# Altium PCB MAGI'sBatteryPowerMega-Python.PcbDoc (part 2 of 3)
Units mil, origin at the board's own origin, x right, y up, seen from the top; angles counter-clockwise.
Board outline 6000 x 4000 mil, 2 copper layers (Top Layer, Bottom Layer); 34 components, 41 nets, 184 pads, 153 vias.
Unrouted connection lines stored in the file: 5.
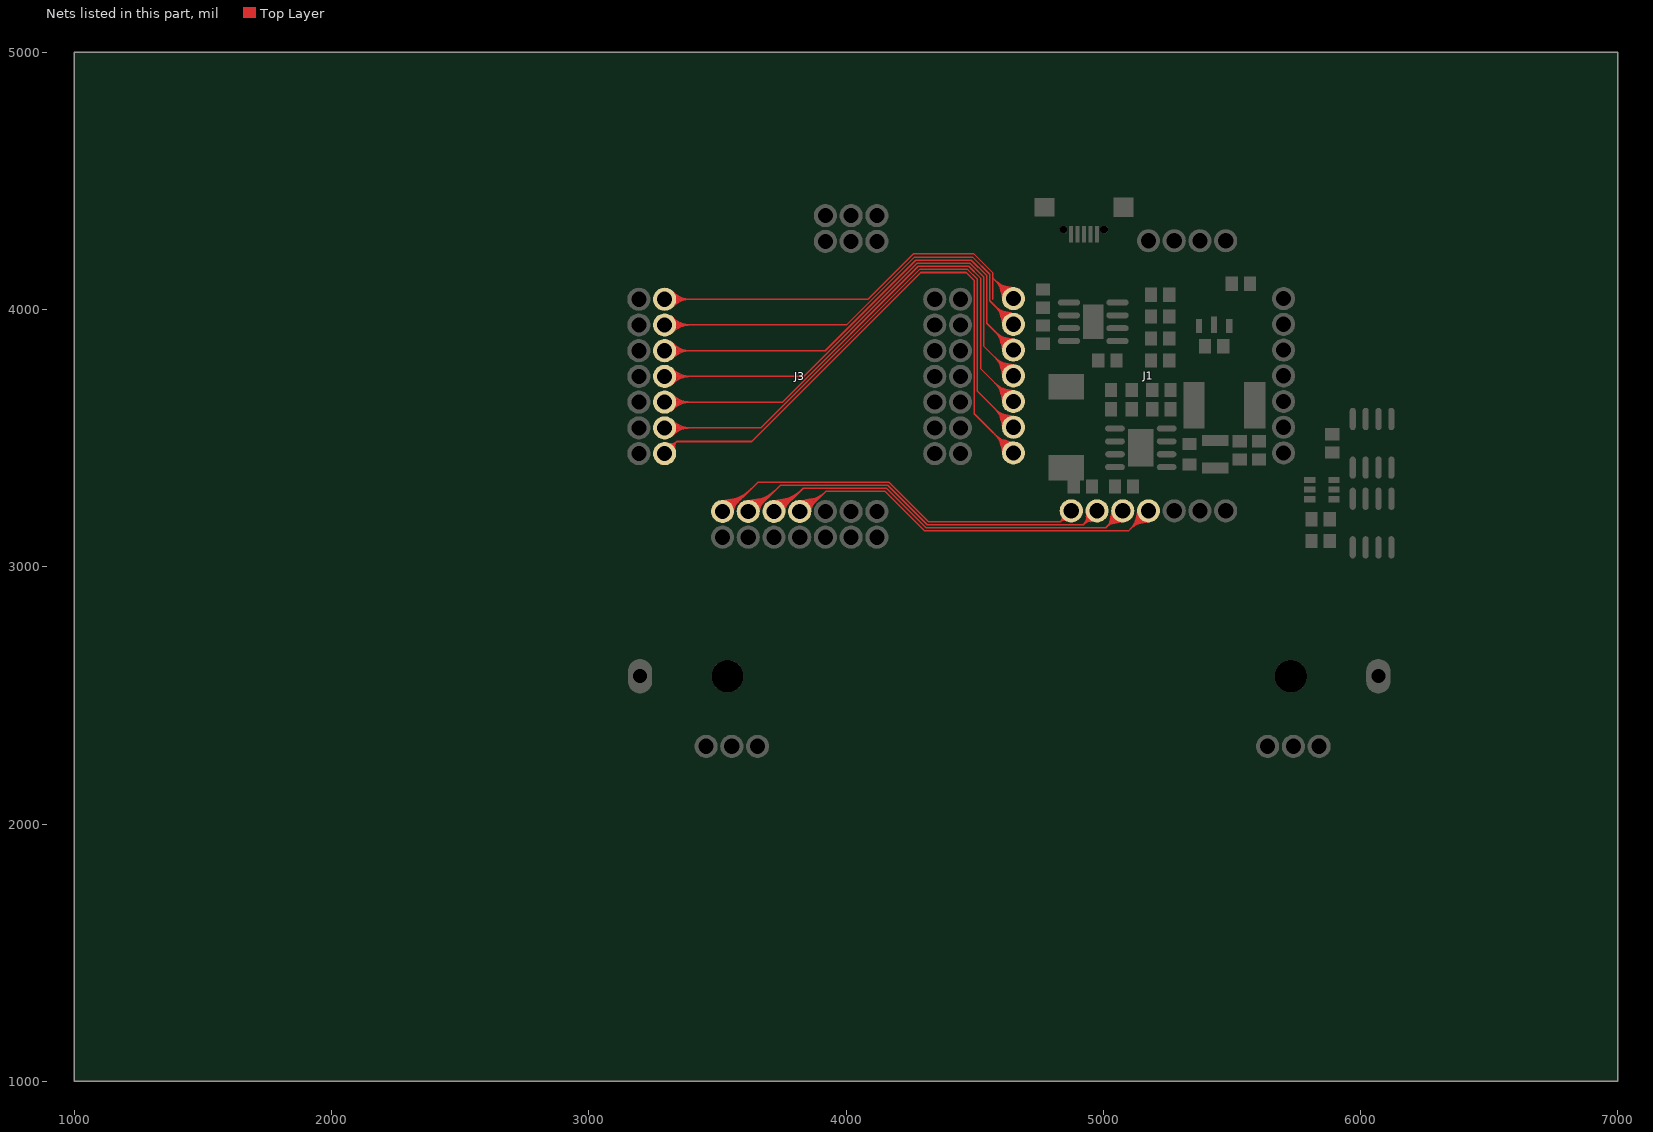
[diagram p2: the nets of this part, all layers, seen from the top]

## Via types
v1: diameter 19.68, hole 19.68, Top Layer to Bottom Layer, 125 vias
v2: diameter 19.68, hole 11.81, Top Layer to Bottom Layer, 11 vias
v3: diameter 35.43, hole 35.43, Top Layer to Bottom Layer, 6 vias
v4: diameter 35.43, hole 31.5, Top Layer to Bottom Layer, 6 vias
v5: diameter 19.68, hole 15.75, Top Layer to Bottom Layer, 5 vias

## Nets (pads, with @x,y where several pads share a name; then routed paths per layer and width w, separated by ;. In a path a pad name is that pad's centre, name@x,y a point inside that pad or via, vN(x,y) a via of type N, cw(c..) or ccw(c..) an arc to the next point about the centre after c; other vN are vias at no path point) (continued)
D0: J1.8 J3.8 | length 4694.6
  Top Layer w6: J3.8@3295,4040 4085.18,4040 4261.18,4216 4497.19,4216 4571,4142.19 4571,4122.39 ; 4571,4039.36 4571,4122.39 ; 4600.32,4082.53 ccw(c4668.05,4097.11) J1.8@4647.36,4030.99 ; 4602.48,4072.47 ccw(c4664.52,4085.82) J1.8@4645.57,4025.26 ; 4603.93,4083.55 ccw(c4658.1,4098.06) J1.8@4650.94,4042.44 ; 4604.65,4062.41 ccw(c4660.99,4074.54) J1.8@4643.78,4019.54 ; 4606.25,4074.9 ccw(c4656.87,4088.47) J1.8@4650.18,4036.49 ; 4606.81,4052.35 ccw(c4657.45,4063.25) J1.8@4641.99,4013.81 ; 4608.56,4066.26 ccw(c4655.63,4078.87) J1.8@4649.41,4030.54 ; 4609.84,4089.46 cw(c4595.32,4035.29) J1.8@4650.94,4042.44 ; 4610.78,4080.37 ccw(c4652.42,4091.53) J1.8@4651.13,4048.44 ; 4610.85,4093.07 cw(c4596.27,4025.34) J1.8@4662.4,4046.02 ; 4612.87,4072.58 ccw(c4652.17,4083.11) J1.8@4650.94,4042.44 ; 4613.01,4082.6 cw(c4601.86,4040.96) J1.8@4644.95,4042.26 ; 4618.48,4087.14 cw(c4604.92,4036.52) J1.8@4656.9,4043.21 ; 4620.81,4080.52 cw(c4610.28,4041.22) J1.8@4650.94,4042.44 ; 4620.91,4090.9 cw(c4607.56,4028.87) J1.8@4668.12,4047.82 ; 4627.13,4084.82 cw(c4614.52,4037.76) J1.8@4662.85,4043.97 ; 4630.97,4088.74 cw(c4618.85,4032.4) J1.8@4673.85,4049.61 ; 4641.04,4086.57 cw(c4630.14,4035.93) J1.8@4679.58,4051.4 ; 3352.94,4040 cw(c3352.94,4097.94) 3311.97,4056.97 ccw(c3352.94,4097.94) 3352.94,4040 ; 3352.94,4040 ccw(c3352.94,3982.06) 3311.97,4023.03 cw(c3352.94,3982.06) 3352.94,4040 ; 3367.43,4040 cw(c3367.43,4112.43) 3316.21,4061.21 ccw(c3367.43,4112.43) 3367.43,4040 ; 3367.43,4040 ccw(c3367.43,3967.57) 3316.21,4018.79 cw(c3367.43,3967.57) 3367.43,4040 ; 3381.91,4040 cw(c3381.91,4126.91) 3320.46,4065.46 ccw(c3381.91,4126.91) 3381.91,4040 ; 3381.91,4040 ccw(c3381.91,3953.09) 3320.46,4014.54 cw(c3381.91,3953.09) 3381.91,4040 ; 3396.4,4040 cw(c3396.4,4141.4) 3324.7,4069.7 ccw(c3396.4,4141.4) 3396.4,4040 ; 3396.4,4040 ccw(c3396.4,3938.6) 3324.7,4010.3 cw(c3396.4,3938.6) 3396.4,4040 ; 4571,4122.39 J1.8@4650.94,4042.44 ; 4579.25,4114.14 cw(c4507.55,4042.44) 4608.94,4042.44 ccw(c4507.55,4042.44) 4579.25,4114.14 ; 4579.25,4114.14 ccw(c4650.94,4185.84) 4650.94,4084.44 cw(c4650.94,4185.84) 4579.25,4114.14 ; 4589.49,4103.9 cw(c4528.03,4042.44) 4614.94,4042.44 ccw(c4528.03,4042.44) 4589.49,4103.9 ; 4589.49,4103.9 ccw(c4650.94,4165.35) 4650.94,4078.44 cw(c4650.94,4165.35) 4589.49,4103.9 ; 4599.73,4093.65 cw(c4548.52,4042.44) 4620.94,4042.44 ccw(c4548.52,4042.44) 4599.73,4093.65 ; 4599.73,4093.65 ccw(c4650.94,4144.87) 4650.94,4072.44 cw(c4650.94,4144.87) 4599.73,4093.65 ; 4609.97,4083.41 cw(c4569,4042.44) 4626.94,4042.44 ccw(c4569,4042.44) 4609.97,4083.41 ; 4609.97,4083.41 ccw(c4650.94,4124.38) 4650.94,4066.44 cw(c4650.94,4124.38) 4609.97,4083.41
D1: J1.9 J3.9 | length 4733.1
  Top Layer w6: J3.9@3295,3940 4002.15,3940 4266.15,4204 4492.22,4204 4559,4137.22 4559,4034.39 J1.9@4650.94,3942.44 ; 4600.32,3982.53 ccw(c4668.05,3997.11) J1.9@4647.36,3930.99 ; 4602.48,3972.47 ccw(c4664.52,3985.82) J1.9@4645.57,3925.26 ; 4603.93,3983.55 ccw(c4658.1,3998.06) J1.9@4650.94,3942.44 ; 4604.65,3962.41 ccw(c4660.99,3974.54) J1.9@4643.78,3919.54 ; 4606.25,3974.9 ccw(c4656.87,3988.47) J1.9@4650.18,3936.49 ; 4606.81,3952.35 ccw(c4657.45,3963.25) J1.9@4641.99,3913.81 ; 4608.56,3966.26 ccw(c4655.63,3978.87) J1.9@4649.41,3930.54 ; 4609.84,3989.46 cw(c4595.32,3935.29) J1.9@4650.94,3942.44 ; 4610.78,3980.37 ccw(c4652.42,3991.53) J1.9@4651.13,3948.44 ; 4610.85,3993.07 cw(c4596.27,3925.34) J1.9@4662.4,3946.02 ; 4612.87,3972.58 ccw(c4652.17,3983.11) J1.9@4650.94,3942.44 ; 4613.01,3982.6 cw(c4601.86,3940.96) J1.9@4644.95,3942.26 ; 4618.48,3987.14 cw(c4604.92,3936.52) J1.9@4656.9,3943.21 ; 4620.81,3980.52 cw(c4610.28,3941.22) J1.9@4650.94,3942.44 ; 4620.91,3990.9 cw(c4607.56,3928.87) J1.9@4668.12,3947.82 ; 4627.13,3984.82 cw(c4614.52,3937.76) J1.9@4662.85,3943.97 ; 4630.97,3988.74 cw(c4618.85,3932.4) J1.9@4673.85,3949.61 ; 4641.04,3986.57 cw(c4630.14,3935.93) J1.9@4679.58,3951.4 ; 3352.94,3940 cw(c3352.94,3997.94) 3311.97,3956.97 ccw(c3352.94,3997.94) 3352.94,3940 ; 3352.94,3940 ccw(c3352.94,3882.06) 3311.97,3923.03 cw(c3352.94,3882.06) 3352.94,3940 ; 3367.43,3940 cw(c3367.43,4012.43) 3316.21,3961.21 ccw(c3367.43,4012.43) 3367.43,3940 ; 3367.43,3940 ccw(c3367.43,3867.57) 3316.21,3918.79 cw(c3367.43,3867.57) 3367.43,3940 ; 3381.91,3940 cw(c3381.91,4026.91) 3320.46,3965.46 ccw(c3381.91,4026.91) 3381.91,3940 ; 3381.91,3940 ccw(c3381.91,3853.09) 3320.46,3914.54 cw(c3381.91,3853.09) 3381.91,3940 ; 3396.4,3940 cw(c3396.4,4041.4) 3324.7,3969.7 ccw(c3396.4,4041.4) 3396.4,3940 ; 3396.4,3940 ccw(c3396.4,3838.6) 3324.7,3910.3 cw(c3396.4,3838.6) 3396.4,3940 ; 4579.25,4014.14 cw(c4507.55,3942.44) 4608.94,3942.44 ccw(c4507.55,3942.44) 4579.25,4014.14 ; 4579.25,4014.14 ccw(c4650.94,4085.84) 4650.94,3984.44 cw(c4650.94,4085.84) 4579.25,4014.14 ; 4589.49,4003.9 cw(c4528.03,3942.44) 4614.94,3942.44 ccw(c4528.03,3942.44) 4589.49,4003.9 ; 4589.49,4003.9 ccw(c4650.94,4065.35) 4650.94,3978.44 cw(c4650.94,4065.35) 4589.49,4003.9 ; 4599.73,3993.65 cw(c4548.52,3942.44) 4620.94,3942.44 ccw(c4548.52,3942.44) 4599.73,3993.65 ; 4599.73,3993.65 ccw(c4650.94,4044.87) 4650.94,3972.44 cw(c4650.94,4044.87) 4599.73,3993.65 ; 4609.97,3983.41 cw(c4569,3942.44) 4626.94,3942.44 ccw(c4569,3942.44) 4609.97,3983.41 ; 4609.97,3983.41 ccw(c4650.94,4024.38) 4650.94,3966.44 cw(c4650.94,4024.38) 4609.97,3983.41
D2: J1.10 J3.10 | length 4854.7
  Top Layer w6: J3.10@3295,3840 3919.12,3840 4271.12,4192 4487.25,4192 4547,4132.25 4547,3946.39 J1.10@4650.94,3842.44 ; 4600.32,3882.53 ccw(c4668.05,3897.11) J1.10@4647.36,3830.99 ; 4602.48,3872.47 ccw(c4664.52,3885.82) J1.10@4645.57,3825.26 ; 4603.93,3883.55 ccw(c4658.1,3898.06) J1.10@4650.94,3842.44 ; 4604.65,3862.41 ccw(c4660.99,3874.54) J1.10@4643.78,3819.54 ; 4606.25,3874.9 ccw(c4656.87,3888.47) J1.10@4650.18,3836.49 ; 4606.81,3852.35 ccw(c4657.45,3863.25) J1.10@4641.99,3813.81 ; 4608.56,3866.26 ccw(c4655.63,3878.87) J1.10@4649.41,3830.54 ; 4609.84,3889.46 cw(c4595.32,3835.29) J1.10@4650.94,3842.44 ; 4610.78,3880.37 ccw(c4652.42,3891.53) J1.10@4651.13,3848.44 ; 4610.85,3893.07 cw(c4596.27,3825.34) J1.10@4662.4,3846.02 ; 4612.87,3872.58 ccw(c4652.17,3883.11) J1.10@4650.94,3842.44 ; 4613.01,3882.6 cw(c4601.86,3840.96) J1.10@4644.95,3842.26 ; 4618.48,3887.14 cw(c4604.92,3836.52) J1.10@4656.9,3843.21 ; 4620.81,3880.52 cw(c4610.28,3841.22) J1.10@4650.94,3842.44 ; 4620.91,3890.9 cw(c4607.56,3828.87) J1.10@4668.12,3847.82 ; 4627.13,3884.82 cw(c4614.52,3837.76) J1.10@4662.85,3843.97 ; 4630.97,3888.74 cw(c4618.85,3832.4) J1.10@4673.85,3849.61 ; 4641.04,3886.57 cw(c4630.14,3835.93) J1.10@4679.58,3851.4 ; 3352.94,3840 cw(c3352.94,3897.94) 3311.97,3856.97 ccw(c3352.94,3897.94) 3352.94,3840 ; 3352.94,3840 ccw(c3352.94,3782.06) 3311.97,3823.03 cw(c3352.94,3782.06) 3352.94,3840 ; 3367.43,3840 cw(c3367.43,3912.43) 3316.21,3861.21 ccw(c3367.43,3912.43) 3367.43,3840 ; 3367.43,3840 ccw(c3367.43,3767.57) 3316.21,3818.79 cw(c3367.43,3767.57) 3367.43,3840 ; 3381.91,3840 cw(c3381.91,3926.91) 3320.46,3865.46 ccw(c3381.91,3926.91) 3381.91,3840 ; 3381.91,3840 ccw(c3381.91,3753.09) 3320.46,3814.54 cw(c3381.91,3753.09) 3381.91,3840 ; 3396.4,3840 cw(c3396.4,3941.4) 3324.7,3869.7 ccw(c3396.4,3941.4) 3396.4,3840 ; 3396.4,3840 ccw(c3396.4,3738.6) 3324.7,3810.3 cw(c3396.4,3738.6) 3396.4,3840 ; 4579.25,3914.14 cw(c4507.55,3842.44) 4608.94,3842.44 ccw(c4507.55,3842.44) 4579.25,3914.14 ; 4579.25,3914.14 ccw(c4650.94,3985.84) 4650.94,3884.44 cw(c4650.94,3985.84) 4579.25,3914.14 ; 4589.49,3903.9 cw(c4528.03,3842.44) 4614.94,3842.44 ccw(c4528.03,3842.44) 4589.49,3903.9 ; 4589.49,3903.9 ccw(c4650.94,3965.35) 4650.94,3878.44 cw(c4650.94,3965.35) 4589.49,3903.9 ; 4599.73,3893.65 cw(c4548.52,3842.44) 4620.94,3842.44 ccw(c4548.52,3842.44) 4599.73,3893.65 ; 4599.73,3893.65 ccw(c4650.94,3944.87) 4650.94,3872.44 cw(c4650.94,3944.87) 4599.73,3893.65 ; 4609.97,3883.41 cw(c4569,3842.44) 4626.94,3842.44 ccw(c4569,3842.44) 4609.97,3883.41 ; 4609.97,3883.41 ccw(c4650.94,3924.38) 4650.94,3866.44 cw(c4650.94,3924.38) 4609.97,3883.41
D3: J1.11 J3.11 | length 4976.2
  Top Layer w6: J3.11@3295,3740 3836.09,3740 4276.09,4180 4482.28,4180 4535,4127.28 4535,3858.39 J1.11@4650.94,3742.44 ; 4600.32,3782.53 ccw(c4668.05,3797.11) J1.11@4647.36,3730.99 ; 4602.48,3772.47 ccw(c4664.52,3785.82) J1.11@4645.57,3725.26 ; 4603.93,3783.55 ccw(c4658.1,3798.06) J1.11@4650.94,3742.44 ; 4604.65,3762.41 ccw(c4660.99,3774.54) J1.11@4643.78,3719.54 ; 4606.25,3774.9 ccw(c4656.87,3788.47) J1.11@4650.18,3736.49 ; 4606.81,3752.35 ccw(c4657.45,3763.25) J1.11@4641.99,3713.81 ; 4608.56,3766.26 ccw(c4655.63,3778.87) J1.11@4649.41,3730.54 ; 4609.84,3789.46 cw(c4595.32,3735.29) J1.11@4650.94,3742.44 ; 4610.78,3780.37 ccw(c4652.42,3791.53) J1.11@4651.13,3748.44 ; 4610.85,3793.07 cw(c4596.27,3725.34) J1.11@4662.4,3746.02 ; 4612.87,3772.58 ccw(c4652.17,3783.11) J1.11@4650.94,3742.44 ; 4613.01,3782.6 cw(c4601.86,3740.96) J1.11@4644.95,3742.26 ; 4618.48,3787.14 cw(c4604.92,3736.52) J1.11@4656.9,3743.21 ; 4620.81,3780.52 cw(c4610.28,3741.22) J1.11@4650.94,3742.44 ; 4620.91,3790.9 cw(c4607.56,3728.87) J1.11@4668.12,3747.82 ; 4627.13,3784.82 cw(c4614.52,3737.76) J1.11@4662.85,3743.97 ; 4630.97,3788.74 cw(c4618.85,3732.4) J1.11@4673.85,3749.61 ; 4641.04,3786.57 cw(c4630.14,3735.93) J1.11@4679.58,3751.4 ; 3352.94,3740 cw(c3352.94,3797.94) 3311.97,3756.97 ccw(c3352.94,3797.94) 3352.94,3740 ; 3352.94,3740 ccw(c3352.94,3682.06) 3311.97,3723.03 cw(c3352.94,3682.06) 3352.94,3740 ; 3367.43,3740 cw(c3367.43,3812.43) 3316.21,3761.21 ccw(c3367.43,3812.43) 3367.43,3740 ; 3367.43,3740 ccw(c3367.43,3667.57) 3316.21,3718.79 cw(c3367.43,3667.57) 3367.43,3740 ; 3381.91,3740 cw(c3381.91,3826.91) 3320.46,3765.46 ccw(c3381.91,3826.91) 3381.91,3740 ; 3381.91,3740 ccw(c3381.91,3653.09) 3320.46,3714.54 cw(c3381.91,3653.09) 3381.91,3740 ; 3396.4,3740 cw(c3396.4,3841.4) 3324.7,3769.7 ccw(c3396.4,3841.4) 3396.4,3740 ; 3396.4,3740 ccw(c3396.4,3638.6) 3324.7,3710.3 cw(c3396.4,3638.6) 3396.4,3740 ; 4579.25,3814.14 cw(c4507.55,3742.44) 4608.94,3742.44 ccw(c4507.55,3742.44) 4579.25,3814.14 ; 4579.25,3814.14 ccw(c4650.94,3885.84) 4650.94,3784.44 cw(c4650.94,3885.84) 4579.25,3814.14 ; 4589.49,3803.9 cw(c4528.03,3742.44) 4614.94,3742.44 ccw(c4528.03,3742.44) 4589.49,3803.9 ; 4589.49,3803.9 ccw(c4650.94,3865.35) 4650.94,3778.44 cw(c4650.94,3865.35) 4589.49,3803.9 ; 4599.73,3793.65 cw(c4548.52,3742.44) 4620.94,3742.44 ccw(c4548.52,3742.44) 4599.73,3793.65 ; 4599.73,3793.65 ccw(c4650.94,3844.87) 4650.94,3772.44 cw(c4650.94,3844.87) 4599.73,3793.65 ; 4609.97,3783.41 cw(c4569,3742.44) 4626.94,3742.44 ccw(c4569,3742.44) 4609.97,3783.41 ; 4609.97,3783.41 ccw(c4650.94,3824.38) 4650.94,3766.44 cw(c4650.94,3824.38) 4609.97,3783.41
D4: J1.12 J3.12 | length 5097.8
  Top Layer w6: J3.12@3295,3640 3753.06,3640 4281.06,4168 4477.31,4168 4523,4122.31 4523,3770.39 J1.12@4650.94,3642.44 ; 4600.32,3682.53 ccw(c4668.05,3697.11) J1.12@4647.36,3630.99 ; 4602.48,3672.47 ccw(c4664.52,3685.82) J1.12@4645.57,3625.26 ; 4603.93,3683.55 ccw(c4658.1,3698.06) J1.12@4650.94,3642.44 ; 4604.65,3662.41 ccw(c4660.99,3674.54) J1.12@4643.78,3619.54 ; 4606.25,3674.9 ccw(c4656.87,3688.47) J1.12@4650.18,3636.49 ; 4606.81,3652.35 ccw(c4657.45,3663.25) J1.12@4641.99,3613.81 ; 4608.56,3666.26 ccw(c4655.63,3678.87) J1.12@4649.41,3630.54 ; 4609.84,3689.46 cw(c4595.32,3635.29) J1.12@4650.94,3642.44 ; 4610.78,3680.37 ccw(c4652.42,3691.53) J1.12@4651.13,3648.44 ; 4610.85,3693.07 cw(c4596.27,3625.34) J1.12@4662.4,3646.02 ; 4612.87,3672.58 ccw(c4652.17,3683.11) J1.12@4650.94,3642.44 ; 4613.01,3682.6 cw(c4601.86,3640.96) J1.12@4644.95,3642.26 ; 4618.48,3687.14 cw(c4604.92,3636.52) J1.12@4656.9,3643.21 ; 4620.81,3680.52 cw(c4610.28,3641.22) J1.12@4650.94,3642.44 ; 4620.91,3690.9 cw(c4607.56,3628.87) J1.12@4668.12,3647.82 ; 4627.13,3684.82 cw(c4614.52,3637.76) J1.12@4662.85,3643.97 ; 4630.97,3688.74 cw(c4618.85,3632.4) J1.12@4673.85,3649.61 ; 4641.04,3686.57 cw(c4630.14,3635.93) J1.12@4679.58,3651.4 ; 3352.94,3640 cw(c3352.94,3697.94) 3311.97,3656.97 ccw(c3352.94,3697.94) 3352.94,3640 ; 3352.94,3640 ccw(c3352.94,3582.06) 3311.97,3623.03 cw(c3352.94,3582.06) 3352.94,3640 ; 3367.43,3640 cw(c3367.43,3712.43) 3316.21,3661.21 ccw(c3367.43,3712.43) 3367.43,3640 ; 3367.43,3640 ccw(c3367.43,3567.57) 3316.21,3618.79 cw(c3367.43,3567.57) 3367.43,3640 ; 3381.91,3640 cw(c3381.91,3726.91) 3320.46,3665.46 ccw(c3381.91,3726.91) 3381.91,3640 ; 3381.91,3640 ccw(c3381.91,3553.09) 3320.46,3614.54 cw(c3381.91,3553.09) 3381.91,3640 ; 3396.4,3640 cw(c3396.4,3741.4) 3324.7,3669.7 ccw(c3396.4,3741.4) 3396.4,3640 ; 3396.4,3640 ccw(c3396.4,3538.6) 3324.7,3610.3 cw(c3396.4,3538.6) 3396.4,3640 ; 4579.25,3714.14 cw(c4507.55,3642.44) 4608.94,3642.44 ccw(c4507.55,3642.44) 4579.25,3714.14 ; 4579.25,3714.14 ccw(c4650.94,3785.84) 4650.94,3684.44 cw(c4650.94,3785.84) 4579.25,3714.14 ; 4589.49,3703.9 cw(c4528.03,3642.44) 4614.94,3642.44 ccw(c4528.03,3642.44) 4589.49,3703.9 ; 4589.49,3703.9 ccw(c4650.94,3765.35) 4650.94,3678.44 cw(c4650.94,3765.35) 4589.49,3703.9 ; 4599.73,3693.65 cw(c4548.52,3642.44) 4620.94,3642.44 ccw(c4548.52,3642.44) 4599.73,3693.65 ; 4599.73,3693.65 ccw(c4650.94,3744.87) 4650.94,3672.44 cw(c4650.94,3744.87) 4599.73,3693.65 ; 4609.97,3683.41 cw(c4569,3642.44) 4626.94,3642.44 ccw(c4569,3642.44) 4609.97,3683.41 ; 4609.97,3683.41 ccw(c4650.94,3724.38) 4650.94,3666.44 cw(c4650.94,3724.38) 4609.97,3683.41
D5: J1.13 J3.13 | length 5219.3
  Top Layer w6: J3.13@3295,3540 3670.03,3540 4286.03,4156 4472.34,4156 4511,4117.34 4511,3682.39 J1.13@4650.94,3542.44 ; 4600.32,3582.53 ccw(c4668.05,3597.11) J1.13@4647.36,3530.99 ; 4602.48,3572.47 ccw(c4664.52,3585.82) J1.13@4645.57,3525.26 ; 4603.93,3583.55 ccw(c4658.1,3598.06) J1.13@4650.94,3542.44 ; 4604.65,3562.41 ccw(c4660.99,3574.54) J1.13@4643.78,3519.54 ; 4606.25,3574.9 ccw(c4656.87,3588.47) J1.13@4650.18,3536.49 ; 4606.81,3552.35 ccw(c4657.45,3563.25) J1.13@4641.99,3513.81 ; 4608.56,3566.26 ccw(c4655.63,3578.87) J1.13@4649.41,3530.54 ; 4609.84,3589.46 cw(c4595.32,3535.29) J1.13@4650.94,3542.44 ; 4610.78,3580.37 ccw(c4652.42,3591.53) J1.13@4651.13,3548.44 ; 4610.85,3593.07 cw(c4596.27,3525.34) J1.13@4662.4,3546.02 ; 4612.87,3572.58 ccw(c4652.17,3583.11) J1.13@4650.94,3542.44 ; 4613.01,3582.6 cw(c4601.86,3540.96) J1.13@4644.95,3542.26 ; 4618.48,3587.14 cw(c4604.92,3536.52) J1.13@4656.9,3543.21 ; 4620.81,3580.52 cw(c4610.28,3541.22) J1.13@4650.94,3542.44 ; 4620.91,3590.9 cw(c4607.56,3528.87) J1.13@4668.12,3547.82 ; 4627.13,3584.82 cw(c4614.52,3537.76) J1.13@4662.85,3543.97 ; 4630.97,3588.74 cw(c4618.85,3532.4) J1.13@4673.85,3549.61 ; 4641.04,3586.57 cw(c4630.14,3535.93) J1.13@4679.58,3551.4 ; 3352.94,3540 cw(c3352.94,3597.94) 3311.97,3556.97 ccw(c3352.94,3597.94) 3352.94,3540 ; 3352.94,3540 ccw(c3352.94,3482.06) 3311.97,3523.03 cw(c3352.94,3482.06) 3352.94,3540 ; 3367.43,3540 cw(c3367.43,3612.43) 3316.21,3561.21 ccw(c3367.43,3612.43) 3367.43,3540 ; 3367.43,3540 ccw(c3367.43,3467.57) 3316.21,3518.79 cw(c3367.43,3467.57) 3367.43,3540 ; 3381.91,3540 cw(c3381.91,3626.91) 3320.46,3565.46 ccw(c3381.91,3626.91) 3381.91,3540 ; 3381.91,3540 ccw(c3381.91,3453.09) 3320.46,3514.54 cw(c3381.91,3453.09) 3381.91,3540 ; 3396.4,3540 cw(c3396.4,3641.4) 3324.7,3569.7 ccw(c3396.4,3641.4) 3396.4,3540 ; 3396.4,3540 ccw(c3396.4,3438.6) 3324.7,3510.3 cw(c3396.4,3438.6) 3396.4,3540 ; 4579.25,3614.14 cw(c4507.55,3542.44) 4608.94,3542.44 ccw(c4507.55,3542.44) 4579.25,3614.14 ; 4579.25,3614.14 ccw(c4650.94,3685.84) 4650.94,3584.44 cw(c4650.94,3685.84) 4579.25,3614.14 ; 4589.49,3603.9 cw(c4528.03,3542.44) 4614.94,3542.44 ccw(c4528.03,3542.44) 4589.49,3603.9 ; 4589.49,3603.9 ccw(c4650.94,3665.35) 4650.94,3578.44 cw(c4650.94,3665.35) 4589.49,3603.9 ; 4599.73,3593.65 cw(c4548.52,3542.44) 4620.94,3542.44 ccw(c4548.52,3542.44) 4599.73,3593.65 ; 4599.73,3593.65 ccw(c4650.94,3644.87) 4650.94,3572.44 cw(c4650.94,3644.87) 4599.73,3593.65 ; 4609.97,3583.41 cw(c4569,3542.44) 4626.94,3542.44 ccw(c4569,3542.44) 4609.97,3583.41 ; 4609.97,3583.41 ccw(c4650.94,3624.38) 4650.94,3566.44 cw(c4650.94,3624.38) 4609.97,3583.41
D6: J1.14 J3.14 | length 4809.7
  Top Layer w6: J3.14@3275.55,3462.84 cw(c3318.4,3412.53) 3323.67,3478.4 ; J3.14@3295,3440 3342,3487 ; J3.14@3317.84,3420.55 ccw(c3267.53,3463.4) 3333.4,3468.67 ; 4600.32,3482.53 ccw(c4668.05,3497.11) J1.14@4647.36,3430.99 ; 4602.48,3472.47 ccw(c4664.52,3485.82) J1.14@4645.57,3425.26 ; 4603.93,3483.55 ccw(c4658.1,3498.06) J1.14@4650.94,3442.44 ; 4604.65,3462.41 ccw(c4660.99,3474.54) J1.14@4643.78,3419.54 ; 4606.25,3474.9 ccw(c4656.87,3488.47) J1.14@4650.18,3436.49 ; 4606.81,3452.35 ccw(c4657.45,3463.25) J1.14@4641.99,3413.81 ; 4608.56,3466.26 ccw(c4655.63,3478.87) J1.14@4649.41,3430.54 ; 4609.84,3489.46 cw(c4595.32,3435.29) J1.14@4650.94,3442.44 ; 4610.78,3480.37 ccw(c4652.42,3491.53) J1.14@4651.13,3448.44 ; 4610.85,3493.07 cw(c4596.27,3425.34) J1.14@4662.4,3446.02 ; 4612.87,3472.58 ccw(c4652.17,3483.11) J1.14@4650.94,3442.44 ; 4613.01,3482.6 cw(c4601.86,3440.96) J1.14@4644.95,3442.26 ; 4618.48,3487.14 cw(c4604.92,3436.52) J1.14@4656.9,3443.21 ; 4620.81,3480.52 cw(c4610.28,3441.22) J1.14@4650.94,3442.44 ; 4620.91,3490.9 cw(c4607.56,3428.87) J1.14@4668.12,3447.82 ; 4627.13,3484.82 cw(c4614.52,3437.76) J1.14@4662.85,3443.97 ; 4630.97,3488.74 cw(c4618.85,3432.4) J1.14@4673.85,3449.61 ; 4641.04,3486.57 cw(c4630.14,3435.93) J1.14@4679.58,3451.4 ; 3328.57,3473.57 cw(c3312.61,3489.53) 3305.05,3468.27 ccw(c3312.61,3489.53) 3328.57,3473.57 ; 3328.57,3473.57 ccw(c3344.53,3457.61) 3323.27,3450.05 cw(c3344.53,3457.61) 3328.57,3473.57 ; 3335.28,3480.28 cw(c3316.14,3499.43) 3307.06,3473.92 ccw(c3316.14,3499.43) 3335.28,3480.28 ; 3335.28,3480.28 ccw(c3354.43,3461.14) 3328.92,3452.06 cw(c3354.43,3461.14) 3335.28,3480.28 ; 3342,3487 cw(c3319.66,3509.34) 3309.07,3479.57 ccw(c3319.66,3509.34) 3342,3487 ; 3342,3487 ccw(c3364.34,3464.66) 3334.57,3454.07 cw(c3364.34,3464.66) 3342,3487 ; 3342,3487 3634,3487 4291,4144 4467.37,4144 4499,4112.37 4499,3594.39 J1.14@4650.94,3442.44 ; 4579.25,3514.14 cw(c4507.55,3442.44) 4608.94,3442.44 ccw(c4507.55,3442.44) 4579.25,3514.14 ; 4579.25,3514.14 ccw(c4650.94,3585.84) 4650.94,3484.44 cw(c4650.94,3585.84) 4579.25,3514.14 ; 4589.49,3503.9 cw(c4528.03,3442.44) 4614.94,3442.44 ccw(c4528.03,3442.44) 4589.49,3503.9 ; 4589.49,3503.9 ccw(c4650.94,3565.35) 4650.94,3478.44 cw(c4650.94,3565.35) 4589.49,3503.9 ; 4599.73,3493.65 cw(c4548.52,3442.44) 4620.94,3442.44 ccw(c4548.52,3442.44) 4599.73,3493.65 ; 4599.73,3493.65 ccw(c4650.94,3544.87) 4650.94,3472.44 cw(c4650.94,3544.87) 4599.73,3493.65 ; 4609.97,3483.41 cw(c4569,3442.44) 4626.94,3442.44 ccw(c4569,3442.44) 4609.97,3483.41 ; 4609.97,3483.41 ccw(c4650.94,3524.38) 4650.94,3466.44 cw(c4650.94,3524.38) 4609.97,3483.41
D7: J1.15 J3.15 | length 4325.1
  Top Layer w6: J3.15@3494.72,3231.15 cw(c3548.65,3196.69) 3538.79,3259.93 ; J3.15@3499.78,3227.92 cw(c3563.6,3187.14) 3551.93,3261.98 ; J3.15@3503.23,3221.53 cw(c3556.2,3200.91) 3543.65,3256.35 ; J3.15@3504.83,3224.69 cw(c3578.56,3177.59) 3565.07,3264.03 ; J3.15@3508.82,3219.35 cw(c3568.89,3195.97) 3554.66,3258.85 ; J3.15@3514.24,3216.69 cw(c3565.13,3201.73) 3552.08,3253.14 ; J3.15@3514.41,3217.18 cw(c3581.59,3191.03) 3565.67,3261.34 ; J3.15@3519.23,3191.01 ccw(c3520.69,3236.44) 3564.59,3224.68 ; J3.15@3519.42,3197.01 ccw(c3520.94,3244.2) 3566.55,3231.98 ; J3.15@3519.61,3203.01 ccw(c3521.19,3251.97) 3568.51,3239.29 ; J3.15@3525.76,3213.31 cw(c3588.6,3194.83) 3572.48,3258.32 ; J3.15@3525.87,3213.78 cw(c3571.98,3204.17) 3559.79,3249.66 ; J3.15@3531.51,3211.62 cw(c3600.33,3191.39) 3582.68,3260.91 ; J3.15@3531.75,3212.55 cw(c3582.67,3201.94) 3569.2,3252.18 ; J3.15@3531.93,3213.7 cw(c3565.81,3209.99) 3556.99,3242.91 ; J3.15@3537.62,3211.33 cw(c3593.35,3199.72) 3578.62,3254.71 ; J3.15@3537.89,3213.04 cw(c3575.16,3208.97) 3565.46,3245.18 ; J3.15@3538,3246.18 ccw(c3551.78,3270.04) 3558.91,3243.42 ; J3.15@3543.99,3215.72 cw(c3566.18,3216.39) 3560.44,3237.83 ; 3557.88,3249.15 cw(c3552.12,3270.64) 3541,3251.37 ccw(c3562.02,3287.78) 3572.9,3247.17 ; 3562.28,3255.73 ccw(c3576.87,3198.28) J3.15@3520,3215 ; 3576.68,3263.83 ccw(c3594.28,3186.09) J3.15@3520,3215 ; J1.15@4875.94,3217.44 4833.94,3175.44 ; J3.15@3520,3215 3543.63,3215 3657.63,3329 4167.22,3329 4320.78,3175.44 4833.94,3175.44 ; 4833.95,3175.44 cw(c4848.79,3160.6) 4857.84,3179.54 ccw(c4848.79,3160.6) 4833.95,3175.44 ; 4833.95,3175.44 ccw(c4819.1,3190.29) 4838.05,3199.34 cw(c4819.1,3190.29) 4833.95,3175.44 ; 4839.95,3181.44 cw(c4852.67,3168.72) 4860.43,3184.96 ccw(c4852.67,3168.72) 4839.95,3181.44 ; 4839.95,3181.44 ccw(c4827.22,3194.17) 4843.46,3201.92 cw(c4827.22,3194.17) 4839.95,3181.44 ; J3.15@3520,3221 ccw(c3520,3292.54) 3570.59,3241.95 cw(c3520,3292.54) J3.15@3520,3221 ; J3.15@3520,3227 ccw(c3520,3313.02) 3580.83,3252.2 cw(c3520,3313.02) J3.15@3520,3227 ; J3.15@3520,3233 ccw(c3520,3333.51) 3591.07,3262.44 cw(c3520,3333.51) J3.15@3520,3233 ; J3.15@3520,3239 ccw(c3520,3353.99) 3601.31,3272.68 cw(c3520,3353.99) J3.15@3520,3239 ; J3.15@3520,3245 ccw(c3520,3374.48) 3611.56,3282.92 cw(c3520,3374.48) J3.15@3520,3245 ; J3.15@3520,3251 ccw(c3520,3394.97) 3621.8,3293.17 cw(c3520,3394.97) J3.15@3520,3251 ; J3.15@3520,3257 ccw(c3520,3415.45) 3632.04,3303.41 cw(c3520,3415.45) J3.15@3520,3257 ; J3.15@3556,3215 cw(c3585.86,3215) 3564.75,3236.11 ccw(c3585.86,3215) J3.15@3556,3215 ; J3.15@3562,3215 cw(c3606.34,3215) 3574.99,3246.36 ccw(c3606.34,3215) J3.15@3562,3215
D8: J1.16 J3.16 | length 4737.8
  Top Layer w6: J3.16@3594.72,3231.15 cw(c3648.65,3196.69) 3638.79,3259.93 ; J3.16@3599.78,3227.92 cw(c3663.6,3187.14) 3651.93,3261.98 ; J3.16@3603.23,3221.53 cw(c3656.2,3200.91) 3643.65,3256.35 ; J3.16@3604.83,3224.69 cw(c3678.56,3177.59) 3665.07,3264.03 ; J3.16@3608.82,3219.35 cw(c3668.89,3195.97) 3654.66,3258.85 ; J3.16@3614.24,3216.69 cw(c3665.13,3201.73) 3652.08,3253.14 ; J3.16@3614.41,3217.18 cw(c3681.59,3191.03) 3665.67,3261.34 ; J3.16@3619.23,3191.01 ccw(c3620.69,3236.44) 3664.59,3224.68 ; J3.16@3619.42,3197.01 ccw(c3620.94,3244.2) 3666.55,3231.98 ; J3.16@3619.61,3203.01 ccw(c3621.19,3251.97) 3668.51,3239.29 ; J3.16@3625.76,3213.31 cw(c3688.6,3194.83) 3672.48,3258.32 ; J3.16@3625.87,3213.78 cw(c3671.98,3204.17) 3659.79,3249.66 ; J3.16@3631.51,3211.62 cw(c3700.33,3191.39) 3682.68,3260.91 ; J3.16@3631.75,3212.55 cw(c3682.67,3201.94) 3669.2,3252.18 ; J3.16@3631.93,3213.7 cw(c3665.81,3209.99) 3656.99,3242.91 ; J3.16@3637.62,3211.33 cw(c3693.35,3199.72) 3678.62,3254.71 ; J3.16@3637.89,3213.04 cw(c3675.16,3208.97) 3665.46,3245.18 ; J3.16@3638,3246.18 ccw(c3651.78,3270.04) 3658.91,3243.42 ; J3.16@3643.99,3215.72 cw(c3666.18,3216.39) 3660.44,3237.83 ; 3657.88,3249.15 cw(c3652.12,3270.64) 3641,3251.37 ccw(c3662.02,3287.78) 3672.9,3247.17 ; 3662.28,3255.73 ccw(c3676.87,3198.28) J3.16@3620,3215 ; 3676.68,3263.83 ccw(c3694.28,3186.09) J3.16@3620,3215 ; 4934.35,3193.63 cw(c5000.38,3190.89) J1.16@4955.63,3239.52 ; 4952.14,3175.85 ccw(c4949.39,3241.88) J1.16@4998.02,3197.13 ; J1.16@4975.94,3217.44 4921.94,3163.44 ; J3.16@3620,3215 3643.63,3215 3745.63,3317 4162.25,3317 4315.81,3163.44 4921.94,3163.44 ; 4921.95,3163.44 cw(c4956.19,3129.2) 4966.77,3176.46 ccw(c4956.19,3129.2) 4921.95,3163.44 ; 4921.95,3163.44 ccw(c4887.71,3197.68) 4934.96,3208.26 cw(c4887.71,3197.68) 4921.95,3163.44 ; 4929.66,3171.16 cw(c4959.01,3141.81) 4968.08,3182.31 ccw(c4959.01,3141.81) 4929.66,3171.16 ; 4929.66,3171.16 ccw(c4900.31,3200.51) 4940.81,3209.58 cw(c4900.31,3200.51) 4929.66,3171.16 ; J3.16@3620,3221 ccw(c3620,3292.54) 3670.59,3241.95 cw(c3620,3292.54) J3.16@3620,3221 ; J3.16@3620,3227 ccw(c3620,3313.02) 3680.83,3252.2 cw(c3620,3313.02) J3.16@3620,3227 ; J3.16@3620,3233 ccw(c3620,3333.51) 3691.07,3262.44 cw(c3620,3333.51) J3.16@3620,3233 ; J3.16@3620,3239 ccw(c3620,3353.99) 3701.31,3272.68 cw(c3620,3353.99) J3.16@3620,3239 ; J3.16@3620,3245 ccw(c3620,3374.48) 3711.56,3282.92 cw(c3620,3374.48) J3.16@3620,3245 ; J3.16@3620,3251 ccw(c3620,3394.97) 3721.8,3293.17 cw(c3620,3394.97) J3.16@3620,3251 ; J3.16@3620,3257 ccw(c3620,3415.45) 3732.04,3303.41 cw(c3620,3415.45) J3.16@3620,3257 ; J3.16@3656,3215 cw(c3685.86,3215) 3664.75,3236.11 ccw(c3685.86,3215) J3.16@3656,3215 ; J3.16@3662,3215 cw(c3706.34,3215) 3674.99,3246.36 ccw(c3706.34,3215) J3.16@3662,3215 ; 4937.37,3178.87 cw(c4961.83,3154.41) 4969.39,3188.17 ccw(c4961.83,3154.41) 4937.37,3178.87 ; 4937.38,3178.87 ccw(c4912.92,3203.33) 4946.67,3210.89 cw(c4912.92,3203.33) 4937.38,3178.87
D9: J1.17 J3.17 | length 5662.3
  Top Layer w6: J3.17@3694.72,3231.15 cw(c3748.65,3196.69) 3738.79,3259.93 ; J3.17@3699.78,3227.92 cw(c3763.6,3187.14) 3751.93,3261.98 ; J3.17@3703.23,3221.53 cw(c3756.2,3200.91) 3743.65,3256.35 ; J3.17@3704.83,3224.69 cw(c3778.56,3177.59) 3765.07,3264.03 ; J3.17@3708.82,3219.35 cw(c3768.89,3195.97) 3754.66,3258.85 ; J3.17@3714.24,3216.69 cw(c3765.13,3201.73) 3752.08,3253.14 ; J3.17@3714.41,3217.18 cw(c3781.59,3191.03) 3765.67,3261.34 ; J3.17@3719.23,3191.01 ccw(c3720.69,3236.44) 3764.59,3224.68 ; J3.17@3719.42,3197.01 ccw(c3720.94,3244.2) 3766.55,3231.98 ; J3.17@3719.61,3203.01 ccw(c3721.19,3251.97) 3768.51,3239.29 ; J3.17@3725.76,3213.31 cw(c3788.6,3194.83) 3772.48,3258.32 ; J3.17@3725.87,3213.78 cw(c3771.98,3204.17) 3759.79,3249.66 ; J3.17@3731.51,3211.62 cw(c3800.33,3191.39) 3782.68,3260.91 ; J3.17@3731.75,3212.55 cw(c3782.67,3201.94) 3769.2,3252.18 ; J3.17@3731.93,3213.7 cw(c3765.81,3209.99) 3756.99,3242.91 ; J3.17@3737.62,3211.33 cw(c3793.35,3199.72) 3778.62,3254.71 ; J3.17@3737.89,3213.04 cw(c3775.16,3208.97) 3765.46,3245.18 ; J3.17@3738,3246.18 ccw(c3751.78,3270.04) 3758.91,3243.42 ; J3.17@3743.99,3215.72 cw(c3766.18,3216.39) 3760.44,3237.83 ; 3757.88,3249.15 cw(c3752.12,3270.64) 3741,3251.37 ccw(c3762.02,3287.78) 3772.9,3247.17 ; 3762.28,3255.73 ccw(c3776.87,3198.28) J3.17@3720,3215 ; 3776.68,3263.83 ccw(c3794.28,3186.09) J3.17@3720,3215 ; 5025.89,3175.11 cw(c5097.12,3160.56) J1.17@5071.76,3228.69 ; 5028.05,3185.7 cw(c5092.67,3172.5) J1.17@5069.67,3234.31 ; 5030.22,3196.3 cw(c5088.22,3184.45) J1.17@5067.57,3239.93 ; 5032.31,3177.56 cw(c5091.2,3165.53) J1.17@5074.25,3223.2 ; 5033.61,3167.39 ccw(c5019.06,3238.61) J1.17@5087.19,3213.26 ; 5034.3,3187.32 cw(c5088.02,3176.35) J1.17@5072.56,3228.95 ; 5036.06,3173.8 ccw(c5024.03,3232.7) J1.17@5081.7,3215.75 ; 5044.21,3169.55 ccw(c5031.01,3234.17) J1.17@5092.81,3211.16 ; 5045.83,3175.8 ccw(c5034.85,3229.52) J1.17@5087.46,3214.06 ; 5054.8,3171.72 ccw(c5042.95,3229.72) J1.17@5098.44,3209.07 ; J1.17@5075.94,3217.44 5009.94,3151.44 ; J3.17@3720,3215 3743.63,3215 3833.63,3305 4157.28,3305 4310.84,3151.44 5009.94,3151.44 ; 5009.95,3151.44 cw(c5068.43,3092.96) 5073.41,3175.52 ccw(c5068.43,3092.96) 5009.95,3151.44 ; 5009.95,3151.44 ccw(c4951.47,3209.93) 5034.02,3214.91 cw(c4951.47,3209.93) 5009.95,3151.44 ; 5019.38,3160.87 cw(c5069.5,3110.74) 5073.78,3181.51 ccw(c5069.5,3110.74) 5019.38,3160.87 ; 5019.38,3160.87 ccw(c4969.25,3211) 5040.01,3215.27 cw(c4969.25,3211) 5019.38,3160.87 ; 5028.8,3170.3 cw(c5070.58,3128.53) 5074.14,3187.5 ccw(c5070.58,3128.53) 5028.8,3170.3 ; 5028.8,3170.3 ccw(c4987.03,3212.07) 5046,3215.63 cw(c4987.03,3212.07) 5028.8,3170.3 ; 5038.23,3179.73 cw(c5071.65,3146.31) 5074.5,3193.48 ccw(c5071.65,3146.31) 5038.23,3179.73 ; 5038.23,3179.73 ccw(c5004.81,3213.15) 5051.99,3215.99 cw(c5004.81,3213.15) 5038.23,3179.73 ; J3.17@3720,3221 ccw(c3720,3292.54) 3770.59,3241.95 cw(c3720,3292.54) J3.17@3720,3221 ; J3.17@3720,3227 ccw(c3720,3313.02) 3780.83,3252.2 cw(c3720,3313.02) J3.17@3720,3227 ; J3.17@3720,3233 ccw(c3720,3333.51) 3791.07,3262.44 cw(c3720,3333.51) J3.17@3720,3233 ; J3.17@3720,3239 ccw(c3720,3353.99) 3801.31,3272.68 cw(c3720,3353.99) J3.17@3720,3239 ; J3.17@3720,3245 ccw(c3720,3374.48) 3811.56,3282.92 cw(c3720,3374.48) J3.17@3720,3245 ; J3.17@3720,3251 ccw(c3720,3394.97) 3821.8,3293.17 cw(c3720,3394.97) J3.17@3720,3251 ; J3.17@3720,3257 ccw(c3720,3415.45) 3832.04,3303.41 cw(c3720,3415.45) J3.17@3720,3257 ; J3.17@3756,3215 cw(c3785.86,3215) 3764.75,3236.11 ccw(c3785.86,3215) J3.17@3756,3215 ; J3.17@3762,3215 cw(c3806.34,3215) 3774.99,3246.36 ccw(c3806.34,3215) J3.17@3762,3215
D10: J1.18 J3.18 | length 5783.1
  Top Layer w6: J3.18@3795.61,3232.47 cw(c3849.36,3193.96) 3839.3,3259.31 ; J3.18@3800.49,3228.98 cw(c3865.58,3182.34) 3853.4,3261.48 ; J3.18@3804.15,3223.54 cw(c3859.4,3193.77) 3848.09,3255.5 ; J3.18@3805.37,3225.48 cw(c3881.8,3170.72) 3867.5,3263.65 ; J3.18@3809.44,3220.69 cw(c3873.49,3186.18) 3860.38,3257.75 ; J3.18@3810.25,3221.99 cw(c3898.02,3159.1) 3881.6,3265.82 ; J3.18@3814.56,3217.53 cw(c3869.41,3192.01) 3858.5,3251.52 ; J3.18@3814.72,3217.85 cw(c3887.59,3178.59) 3872.67,3260 ; J3.18@3819.23,3191.01 ccw(c3820.69,3236.44) 3864.59,3224.68 ; J3.18@3819.42,3197.01 ccw(c3820.94,3244.2) 3866.55,3231.98 ; J3.18@3819.61,3203.01 ccw(c3821.19,3251.97) 3868.51,3239.29 ; J3.18@3825.62,3212.91 cw(c3876.06,3194.12) 3866.36,3247.06 ; J3.18@3831.64,3212.09 cw(c3868.62,3202.83) 3861.75,3240.33 ; J3.18@3840.45,3244.63 ccw(c3856.1,3267.3) 3861.07,3240.2 ; J3.18@3843.86,3249.56 ccw(c3856.5,3267.87) 3860.51,3245.99 ; 3855.97,3245.16 ccw(c3864.54,3198.41) J3.18@3820,3215 ; 3869.92,3253.61 ccw(c3882.31,3186.01) J3.18@3820,3215 ; 5125.32,3177.35 cw(c5193.05,3162.77) J1.18@5172.36,3228.89 ; 5127.48,3187.41 cw(c5189.52,3174.06) J1.18@5170.57,3234.62 ; 5128.93,3176.33 cw(c5183.1,3161.82) J1.18@5175.94,3217.44 ; 5129.65,3197.47 cw(c5185.99,3185.35) J1.18@5168.78,3240.35 ; 5131.25,3184.98 cw(c5181.87,3171.42) J1.18@5175.18,3223.39 ; 5131.81,3207.53 cw(c5182.45,3196.63) J1.18@5166.99,3246.07 ; 5133.56,3193.63 cw(c5180.63,3181.01) J1.18@5174.41,3229.34 ; 5134.84,3170.43 ccw(c5120.32,3224.6) J1.18@5175.94,3217.44 ; 5135.78,3179.51 cw(c5177.42,3168.35) J1.18@5176.13,3211.44 ; 5135.85,3166.81 ccw(c5121.27,3234.55) J1.18@5187.4,3213.86 ; 5137.87,3187.3 cw(c5177.17,3176.77) J1.18@5175.94,3217.44 ; 5138.01,3177.28 ccw(c5126.86,3218.92) J1.18@5169.95,3217.62 ; 5143.48,3172.74 ccw(c5129.92,3223.36) J1.18@5181.9,3216.68 ; 5145.81,3179.37 ccw(c5135.28,3218.67) J1.18@5175.94,3217.44 ; 5145.91,3168.98 ccw(c5132.56,3231.01) J1.18@5193.12,3212.07 ; 5152.13,3175.06 ccw(c5139.52,3222.13) J1.18@5187.85,3215.91 ; 5155.97,3171.14 ccw(c5143.85,3227.48) J1.18@5198.85,3210.27 ; 5166.04,3173.31 ccw(c5155.14,3223.95) J1.18@5204.58,3208.48 ; J3.18@3820,3215 3843.63,3215 3921.63,3293 ; 3921.63,3292.99 cw(c3833.42,3381.2) 3823.38,3256.86 ccw(c3833.42,3381.2) 3921.63,3292.99 ; 3921.63,3293 4152.31,3293 4305.87,3139.44 5097.94,3139.44 J1.18@5175.94,3217.44 ; 5104.25,3145.74 cw(c5175.94,3074.04) 5175.94,3175.44 ccw(c5175.94,3074.04) 5104.25,3145.74 ; 5104.25,3145.74 ccw(c5032.55,3217.44) 5133.94,3217.44 cw(c5032.55,3217.44) 5104.25,3145.74 ; 5114.49,3155.99 cw(c5175.94,3094.53) 5175.94,3181.44 ccw(c5175.94,3094.53) 5114.49,3155.99 ; 5114.49,3155.99 ccw(c5053.03,3217.44) 5139.94,3217.44 cw(c5053.03,3217.44) 5114.49,3155.99 ; 5124.73,3166.23 cw(c5175.94,3115.01) 5175.94,3187.44 ccw(c5175.94,3115.01) 5124.73,3166.23 ; 5124.73,3166.23 ccw(c5073.52,3217.44) 5145.94,3217.44 cw(c5073.52,3217.44) 5124.73,3166.23 ; 5134.97,3176.47 cw(c5175.94,3135.5) 5175.94,3193.44 ccw(c5175.94,3135.5) 5134.97,3176.47 ; 5134.97,3176.47 ccw(c5094,3217.44) 5151.94,3217.44 cw(c5094,3217.44) 5134.97,3176.47 ; J3.18@3820.48,3220.98 ccw(c3825.19,3279.29) 3866.56,3237.92 cw(c3825.19,3279.29) J3.18@3820.48,3220.98 ; J3.18@3820.97,3226.96 ccw(c3826.56,3296.28) 3875.74,3247.1 cw(c3826.56,3296.28) J3.18@3820.97,3226.96 ; J3.18@3821.45,3232.94 ccw(c3827.94,3313.26) 3884.91,3256.28 cw(c3827.94,3313.26) J3.18@3821.45,3232.94 ; J3.18@3821.93,3238.92 ccw(c3829.31,3330.25) 3894.09,3265.46 cw(c3829.31,3330.25) J3.18@3821.93,3238.92 ; J3.18@3822.41,3244.9 ccw(c3830.68,3347.23) 3903.27,3274.64 cw(c3830.68,3347.23) J3.18@3822.41,3244.9 ; J3.18@3822.9,3250.88 ccw(c3832.05,3364.22) 3912.45,3283.82 cw(c3832.05,3364.22) J3.18@3822.9,3250.88 ; J3.18@3856,3215 cw(c3885.86,3215) 3864.75,3236.11 ccw(c3885.86,3215) J3.18@3856,3215 ; J3.18@3862,3215 cw(c3906.34,3215) 3874.99,3246.36 ccw(c3906.34,3215) J3.18@3862,3215